# Altium PCB nguon.PcbDoc
Units mm, origin at the board's own origin, x right, y up, seen from the top; angles counter-clockwise.
Board outline 41.15 x 27.56 mm, 2 copper layers (Top Layer, Bottom Layer); 36 components, 5 nets, 88 pads, 16 vias.
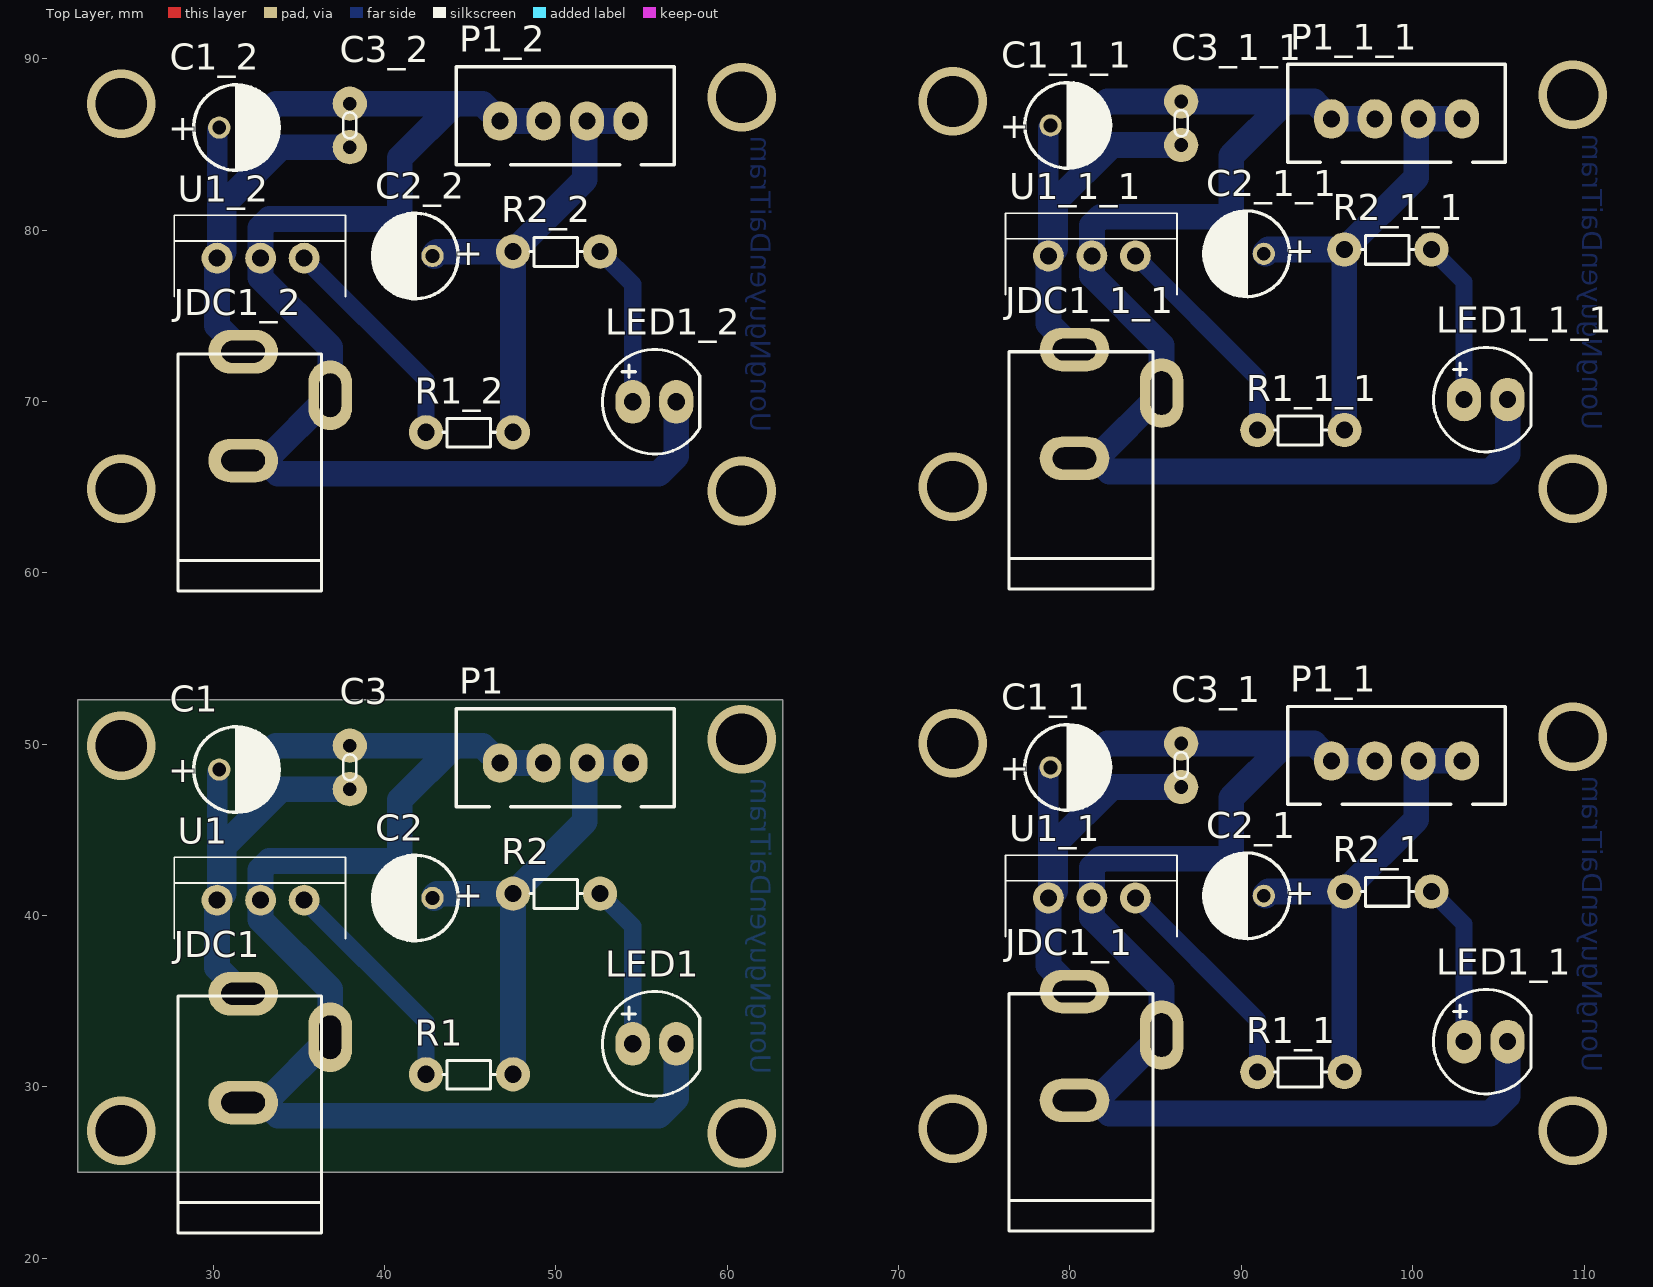
[diagram p0: Top Layer view]
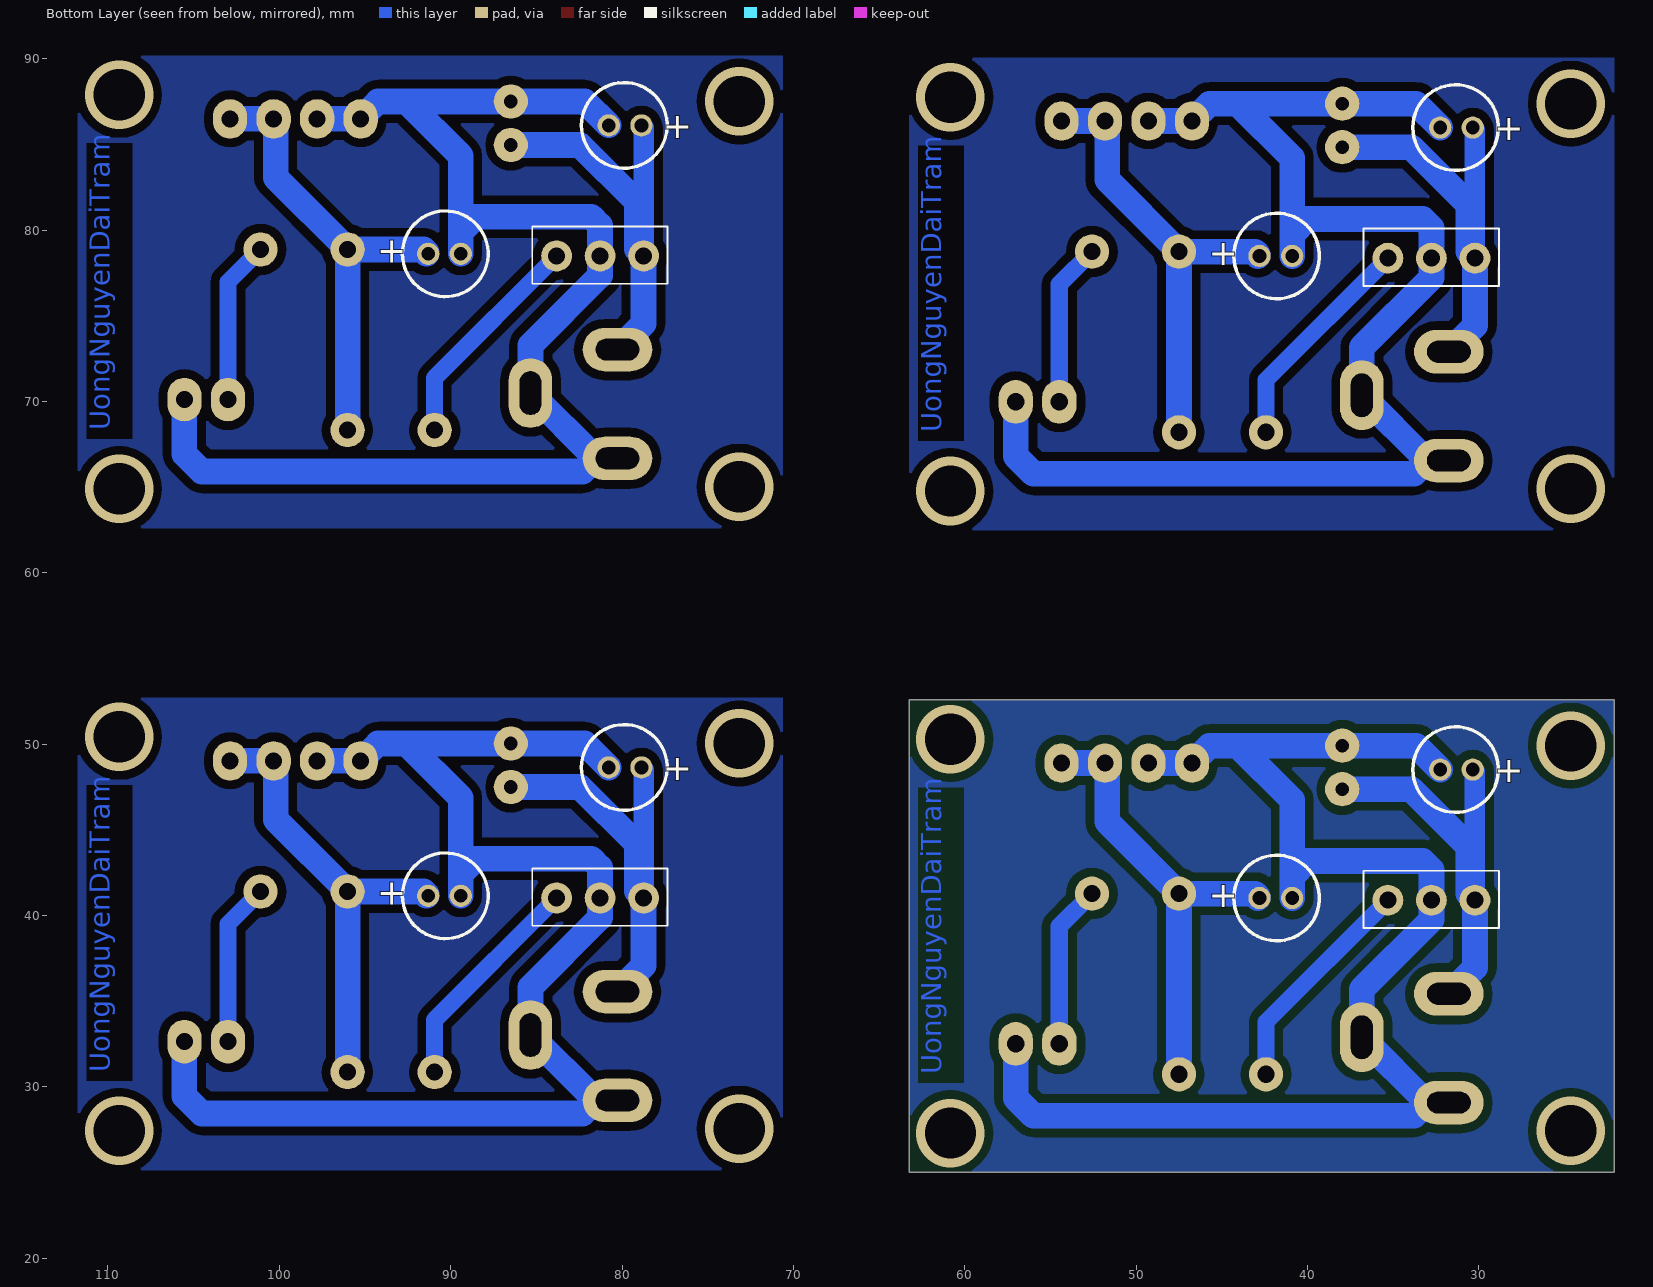
[diagram p1: Bottom Layer view, seen from below]

## Layer stack, top to bottom
Top Solder: solder mask 0.0102, Solder Resist, Dk 3.5
Top Layer: signal copper 0.0356
Dielectric 1: dielectric 0.32, FR-4, Dk 4.8
Bottom Layer: signal copper 0.0356
Bottom Solder: solder mask 0.0102, Solder Resist, Dk 3.5

## Board outline
22.098,25.019 22.098,52.578 63.246,52.578 63.246,25.019

## Design rules (kind name [scope] priority, off if disabled: settings)
Clearance [All] p1: gap=0.5 ignorepadtopadclearanceinfootprint=FALSE
PolygonConnect [All] p1: connectstyle=Relief reliefconductorwidth=0.254 reliefentries=4 polygonreliefangle="90 Angle" airgapwidth=0.254
RoutingVias [All] p1: holewidth=0.711 width=1.27 viastyle="Through Hole" minholewidth=0.711 minwidth=1.27 maxholewidth=0.711 maxwidth=1.27
SolderMaskExpansion [All] p1: expansion=0.102
Width [All] p1: maxlimit=1.5 minlimit=1 preferedwidth=1.2
30 further rules are at their usual default settings.

## Classes and differential pairs
component class nguon: C1 C2 C3 JDC1 LED1 P1 R1 R2 U1

## Components (designator, comment, footprint, x,y, rotation, side; value= is the part's Value field where it differs from the comment)
C1 "100uF" "RADIAL B" 30.353,48.514 r0 top
C1_1 "100uF" "RADIAL B" 78.867,48.641 r0 top (schematic designator C1)
C1_1_1 "100uF" "RADIAL B" 78.867,86.106 r0 top (schematic designator C1)
C1_2 "100uF" "RADIAL B" 30.353,85.979 r0 top (schematic designator C1)
C2 "100uF" "RADIAL B" 42.799,41.021 r180 top
C2_1 "100uF" "RADIAL B" 91.313,41.148 r180 top (schematic designator C2)
C2_1_1 "100uF" "RADIAL B" 91.313,78.613 r180 top (schematic designator C2)
C2_2 "100uF" "RADIAL B" 42.799,78.486 r180 top (schematic designator C2)
C3 "Capacitor Ceramic" Tu-pico 37.973,49.911 r270 top value=104
C3_1 "Capacitor Ceramic" Tu-pico 86.487,50.038 r270 top value=104 (schematic designator C3)
C3_1_1 "Capacitor Ceramic" Tu-pico 86.487,87.503 r270 top value=104 (schematic designator C3)
C3_2 "Capacitor Ceramic" Tu-pico 37.973,87.376 r270 top value=104 (schematic designator C3)
JDC1 "Jac DC" DC0 34.29,32.258 r90 top
JDC1_1 "Jac DC" DC0 82.804,32.385 r90 top (schematic designator JDC1)
JDC1_1_1 "Jac DC" DC0 82.804,69.85 r90 top (schematic designator JDC1)
JDC1_2 "Jac DC" DC0 34.29,69.723 r90 top (schematic designator JDC1)
LED1 "LED" LED-5-RED 54.483,32.512 r0 top value="LED 3 ly Single Colour"
LED1_1 "LED" LED-5-RED 102.997,32.639 r0 top value="LED 3 ly Single Colour" (schematic designator LED1)
LED1_1_1 "LED" LED-5-RED 102.997,70.104 r0 top value="LED 3 ly Single Colour" (schematic designator LED1)
LED1_2 "LED" LED-5-RED 54.483,69.977 r0 top value="LED 3 ly Single Colour" (schematic designator LED1)
P1 "Nguon" JST-XH_B4B-XH-A 50.546,48.895 r0 top
P1_1 "Nguon" JST-XH_B4B-XH-A 99.06,49.022 r0 top (schematic designator P1)
P1_1_1 "Nguon" JST-XH_B4B-XH-A 99.06,86.487 r0 top (schematic designator P1)
P1_2 "Nguon" JST-XH_B4B-XH-A 50.546,86.36 r0 top (schematic designator P1)
R1 "CT" R1/8W 44.958,30.734 r180 top value="R1/4W - 1K"
R1_1 "CT" R1/8W 93.472,30.861 r180 top value="R1/4W - 1K" (schematic designator R1)
R1_1_1 "CT" R1/8W 93.472,68.326 r180 top value="R1/4W - 1K" (schematic designator R1)
R1_2 "CT" R1/8W 44.958,68.199 r180 top value="R1/4W - 1K" (schematic designator R1)
R2 "220" R1/8W 50.038,41.275 r180 top value="R1/4W - 1K"
R2_1 "220" R1/8W 98.552,41.402 r180 top value="R1/4W - 1K" (schematic designator R2)
R2_1_1 "220" R1/8W 98.552,78.867 r180 top value="R1/4W - 1K" (schematic designator R2)
R2_2 "220" R1/8W 50.038,78.74 r180 top value="R1/4W - 1K" (schematic designator R2)
U1 "LM78xx" TO-220 30.226,40.894 r270 top value=LM7805CT
U1_1 "LM78xx" TO-220 78.74,41.021 r270 top value=LM7805CT (schematic designator U1)
U1_1_1 "LM78xx" TO-220 78.74,78.486 r270 top value=LM7805CT (schematic designator U1)
U1_2 "LM78xx" TO-220 30.226,78.359 r270 top value=LM7805CT (schematic designator U1)

## Footprints (in the part's own frame and the unit in brackets; to place one, negate y for a bottom-side part, rotate by r counter-clockwise, add the part's x,y. Pads: shape width x height; smd on the part's side, far side on the other; paste and mask are expansions set on the pad)
DC0 [mil] "Jac DC input"
  oval 100x160 hole 50 slot 100 at 90 deg: 1(125,100) 2(-125,100)
  oval 160x100 hole 50 slot 100 at 0 deg: 3(25,-100)
  silkscreen extent -425,-80 120,250, body extent -410,-105 134,269, height 434
JST-XH_B4B-XH-A [mm] "JST; XH series; 4 circuit; 2.54 Pitch; Through-hole type; Top entry"
  oval 2x2.3 hole 1: 1(-3.81,0) 2(-1.27,0) 3(1.27,0) 4(3.81,0)
  silkscreen extent -6.35,-2.54 6.35,3.17, body extent -6.2,-2.57 6.2,3.18, height 7
LED-5-RED [mm] "LED 2 PIN, 5 ly , Only colour,pin to pin 100mil"
  oval 2x2.54 hole 1: 1(0,0) 2(2.54,0)
  silkscreen extent -1.77,-3.05 3.91,3.04, body extent -1.64,-3.02 3.78,3, height 8.62
R1/8W [mm] "R 1/8W, 2 pin, 300mil"
  round 2 hole 1: 1(-2.54,0) 2(2.54,0)
  silkscreen extent -1.52,-0.81 1.55,0.86, body extent -3.43,-0.9 3.43,0.94, height 2.19
"RADIAL B" [mm] "Capacitor, Electrolytic, Radial; Body 5 x 6.8 mm (Dia.xH typ); Pin Spacing 2 mm (typ)"
  round 1.3 hole 0.8: 1(0,0) 2(1.905,0)
  silkscreen extent -1.5,-2.5 3.5,2.51, body extent -1.48,-2.49 3.52,2.51, height 11
TO-220 [mm]
  round 1.8 hole 1: 1(0,0) 2(0,2.54) 3(0,5.08)
  silkscreen extent -2.5,-2.5 2.25,7.5, body extent -2.4,-2.45 2.1,7.45, height 19.7
Tu-pico [mm] "Tu gom mini"
  round 2 hole 0.8: 1(0,0) 2(2.54,0)
  silkscreen extent 0.51,-0.38 2.03,0.38, body extent -1.65,-0.85 4.19,0.85, height 6.12

## Part data
C1 C1_1 C1_1_1 C1_2 C2 C2_1 C2_1_1 C2_2: library part Cap_Pol, "Polarized Capacitor", Capacitor Type=Tant, Manufacturer=FARNELL, Volt=25V, AEMS Code=2100110, ComponentLink1Description="Digikey Part Link", ComponentLink2Description="Open Datasheet", ComponentLink2URL=H:\LIBRARY\LIBRARY.Datasheet\, Published=13-April-2009, Publisher="Hoang Nguyen", Vendor=Digikey
C3 C3_1 C3_1_1 C3_2: library part CapCeramic, "Capacitor", LatestRevisionDate=17-Jul-2002, LatestRevisionNote="Re-released for DXP Platform.", PackageReference=RAD-0.3, Published=8-Jun-2000, Publisher="Altium Limited"
JDC1 JDC1_1 JDC1_1_1 JDC1_2: library part DCIN, "Jac DC input"
LED1 LED1_1 LED1_1_1 LED1_2: "LED Single colour Green and Red"
P1 P1_1 P1_1_1 P1_2: library part Connector_4pin
R1 R1_1 R1_1_1 R1_2 R2 R2_1 R2_1_1 R2_2: library part R, "Resistor 1/4W"
U1 U1_1 U1_1_1 U1_2: library part 78xx, "Regulator", Manufacturer="Fairchild Semiconductor Corporation", Output Current="Up to 1A", PSpiceTemplate="X^@REFDES %IN %OUT %GND @MODEL", Tolerance="4 %", ComponentLink1Description="Digikey Part Link", ComponentLink2Description="Open Datasheet", ComponentLink2URL=H:\LIBRARY\LIBRARY.Datasheet\LM7805.pdf, Price="2500 VND", Published=13-April-2009, Publisher="Hoang Nguyen", Vendor=Digikey, V out=5V

## Via types
v1: diameter 4, hole 3, Top Layer to Bottom Layer, 16 vias

## Nets (pads, with @x,y where several pads share a name; then routed paths per layer and width w, separated by ;. In a path a pad name is that pad's centre, name@x,y a point inside that pad or via, vN(x,y) a via of type N, cw(c..) or ccw(c..) an arc to the next point about the centre after c; other vN are vias at no path point)
5V: C2.1 P1.3 P1.4 R1.1 R2.2 | length 27.4
  Bottom Layer w1.5: C2.1@42.894,41.021 42.894,41.116 43.053,41.275 R2.2 ; R1.1@47.498,30.607 R1.1 R2.2 ; P1.4 P1.3 51.689,48.768 51.689,45.466 R2.2
12V: C1.1 C3.2 JDC1.1 U1.1 | length 25.8
  Bottom Layer w1.2: U1.1 30.226,48.387 C1.1
  Bottom Layer w1.5: JDC1.1 30.226,36.957 U1.1 30.616,41.284 30.616,44.044 33.943,47.371 C3.2
GND: C1.2 C2.2 C3.1 JDC1.2 JDC1.3 LED1.2 P1.1 P1.2 U1.2 | length 83
  Bottom Layer w1.5: JDC1.2 JDC1.2@33.02,29.083 ; C1.2 33.655,49.911 C3.1 44.069,49.911 ; C2.2 40.894,42.291 ; P1.2 P1.1 45.72,49.911 44.069,49.911 ; LED1.2 57.023,29.337 56.007,28.321 33.782,28.321 JDC1.2@33.02,29.083 ; JDC1.2@33.02,29.083 JDC1.3 36.83,35.687 32.766,39.751 U1.2 32.766,42.672 33.274,43.18 40.005,43.18 40.894,42.291 ; 40.894,42.291 40.894,46.736 44.069,49.911
NetLED1_1: LED1.1 R2.1 | length 9.6
  Bottom Layer w1: R2.1 54.483,39.37 LED1.1
NetR1_2: R1.2 U1.3 | length 13.1
  Bottom Layer w1: U1.3 42.418,33.782 R1.2
pads on no net: C1_1.1 C1_1.2 C1_1_1.1 C1_1_1.2 C1_2.1 C1_2.2 C2_1.1 C2_1.2 C2_1_1.1 C2_1_1.2 C2_2.1 C2_2.2 C3_1.1 C3_1.2 C3_1_1.1 C3_1_1.2 C3_2.1 C3_2.2 JDC1_1.1 JDC1_1.2 JDC1_1.3 JDC1_1_1.1 JDC1_1_1.2 JDC1_1_1.3 JDC1_2.1 JDC1_2.2 JDC1_2.3 LED1_1.1 LED1_1.2 LED1_1_1.1 LED1_1_1.2 LED1_2.1 LED1_2.2 P1_1.1 P1_1.2 P1_1.3 P1_1.4 P1_1_1.1 P1_1_1.2 P1_1_1.3 P1_1_1.4 P1_2.1 P1_2.2 P1_2.3 P1_2.4 R1_1.1 R1_1.2 R1_1_1.1 R1_1_1.2 R1_2.1 R1_2.2 R2_1.1 R2_1.2 R2_1_1.1 R2_1_1.2 R2_2.1 R2_2.2 U1_1.1 U1_1.2 U1_1.3 U1_1_1.1 U1_1_1.2 U1_1_1.3 U1_2.1 U1_2.2 U1_2.3
copper on no net: | length 476.4
  Bottom Layer w1: 35.306,78.359 42.418,71.247 42.418,68.199 ; 52.578,78.74 54.483,76.835 54.483,69.977 ; 83.82,41.021 90.932,33.909 90.932,30.861 ; 83.82,78.486 90.932,71.374 90.932,68.326 ; 101.092,41.402 102.997,39.497 102.997,32.639 ; 101.092,78.867 102.997,76.962 102.997,70.104
  Bottom Layer w1.2: 30.226,78.359 30.226,85.852 30.353,85.979 ; 78.74,41.021 78.74,48.514 78.867,48.641 ; 78.74,78.486 78.74,85.979 78.867,86.106
  Bottom Layer w1.5: 31.75,66.548 33.02,66.548 ; 31.75,72.898 30.226,74.422 30.226,78.359 30.616,78.749 30.616,81.509 33.943,84.836 37.973,84.836 ; 32.258,85.979 33.655,87.376 37.973,87.376 44.069,87.376 ; 40.894,78.486 40.894,79.756 ; 42.894,78.486 42.894,78.581 43.053,78.74 47.498,78.74 ; 47.498,68.072 47.498,68.199 47.498,78.74 ; 49.276,86.36 46.736,86.36 45.72,87.376 44.069,87.376 ; 54.356,86.36 51.816,86.36 51.689,86.233 51.689,82.931 47.498,78.74 ; 57.023,69.977 57.023,66.802 56.007,65.786 33.782,65.786 33.02,66.548 ; 80.264,29.21 81.534,29.21 ; 80.264,35.56 78.74,37.084 78.74,41.021 79.13,41.411 79.13,44.171 82.457,47.498 86.487,47.498 ; 80.264,66.675 81.534,66.675 ; 80.264,73.025 78.74,74.549 78.74,78.486 79.13,78.876 79.13,81.636 82.457,84.963 86.487,84.963 ; 80.772,48.641 82.169,50.038 86.487,50.038 92.583,50.038 ; 80.772,86.106 82.169,87.503 86.487,87.503 92.583,87.503 ; 89.408,41.148 89.408,42.418 ; 89.408,78.613 89.408,79.883 ; 91.408,41.148 91.408,41.243 91.567,41.402 96.012,41.402 ; 91.408,78.613 91.408,78.708 91.567,78.867 96.012,78.867 ; 96.012,30.734 96.012,30.861 96.012,41.402 ; 96.012,68.199 96.012,68.326 96.012,78.867 ; 97.79,49.022 95.25,49.022 94.234,50.038 92.583,50.038 ; 97.79,86.487 95.25,86.487 94.234,87.503 92.583,87.503 ; 102.87,49.022 100.33,49.022 100.203,48.895 100.203,45.593 96.012,41.402 ; 102.87,86.487 100.33,86.487 100.203,86.36 100.203,83.058 96.012,78.867 ; 105.537,32.639 105.537,29.464 104.521,28.448 82.296,28.448 81.534,29.21 ; 105.537,70.104 105.537,66.929 104.521,65.913 82.296,65.913 81.534,66.675 ; 33.02,66.548 36.83,70.358 36.83,73.152 32.766,77.216 32.766,78.359 32.766,80.137 33.274,80.645 40.005,80.645 40.894,79.756 ; 40.894,79.756 40.894,84.201 44.069,87.376 ; 81.534,29.21 85.344,33.02 85.344,35.814 81.28,39.878 81.28,41.021 81.28,42.799 81.788,43.307 88.519,43.307 89.408,42.418 ; 81.534,66.675 85.344,70.485 85.344,73.279 81.28,77.343 81.28,78.486 81.28,80.264 81.788,80.772 88.519,80.772 89.408,79.883 ; 89.408,42.418 89.408,46.863 92.583,50.038 ; 89.408,79.883 89.408,84.328 92.583,87.503
  other v1: 60.833,27.305 24.638,27.432 109.347,27.432 73.152,27.559 24.638,49.911 73.152,50.038 60.833,50.292 109.347,50.419 60.833,64.77 24.638,64.897 109.347,64.897 73.152,65.024 24.638,87.376 73.152,87.503 60.833,87.757 109.347,87.884

## Polygon pours and split planes (outlines as drawn)
no net on Bottom Layer "Bottom Layer-No Net" (solid, pour order 24): 22.098,62.484 22.098,90.043 63.246,90.043 63.246,62.484
no net on Bottom Layer "Bottom Layer-No Net" (solid, pour order 22): 70.612,62.611 70.612,90.17 111.76,90.17 111.76,62.611
no net on Bottom Layer "Bottom Layer-No Net" (solid, pour order 20): 70.612,25.146 70.612,52.705 111.76,52.705 111.76,25.146
no net on Bottom Layer "Bottom Layer-No Net" (solid, pour order 18): 22.098,25.019 22.098,52.578 63.246,52.578 63.246,25.019

## Other copper
Bottom Layer:
  text "UongNguyenDaiTram" at 109.474,68.326 h2 r270
  text "UongNguyenDaiTram" at 60.96,68.199 h2 r270
  text "UongNguyenDaiTram" at 109.474,30.861 h2 r270
  text "UongNguyenDaiTram" at 60.96,30.734 h2 r270

## Silkscreen, mask and mechanical layers (free items; w line width, h text height)
Drill Drawing:
  lines w0.254: 22.098,25.019 63.246,25.019 63.246,52.578 22.098,52.578 22.098,25.019 ; 22.098,62.484 22.098,90.043 63.246,90.043 63.246,62.484 22.098,62.484 ; 70.612,25.146 70.612,52.705 111.76,52.705 111.76,25.146 70.612,25.146 ; 70.612,62.611 111.76,62.611 111.76,90.17 70.612,90.17 70.612,62.611

## Text inside footprints (layer, text, board x,y; h text height)
C1: Top Overlay "+" at 27.378,47.764 h1.5; Bottom Overlay "+" at 27.378,47.764 h1.5
C1_1: Top Overlay "+" at 75.892,47.891 h1.5; Bottom Overlay "+" at 75.892,47.891 h1.5
C1_1_1: Top Overlay "+" at 75.892,85.356 h1.5; Bottom Overlay "+" at 75.892,85.356 h1.5
C1_2: Top Overlay "+" at 27.378,85.229 h1.5; Bottom Overlay "+" at 27.378,85.229 h1.5
C2: Top Overlay "+" at 45.774,41.771 h1.5 r180; Bottom Overlay "+" at 45.774,41.771 h1.5 r180
C2_1: Top Overlay "+" at 94.288,41.898 h1.5 r180; Bottom Overlay "+" at 94.288,41.898 h1.5 r180
C2_1_1: Top Overlay "+" at 94.288,79.363 h1.5 r180; Bottom Overlay "+" at 94.288,79.363 h1.5 r180
C2_2: Top Overlay "+" at 45.774,79.236 h1.5 r180; Bottom Overlay "+" at 45.774,79.236 h1.5 r180